# Altium PCB PlugCB.PcbDoc
Units mil, origin at the board's own origin, x right, y up, seen from the top; angles counter-clockwise.
Board outline 6000 x 4000 mil, 2 copper layers (Top Layer, Bottom Layer); 3 components, 0 nets, 21 pads, 0 vias.
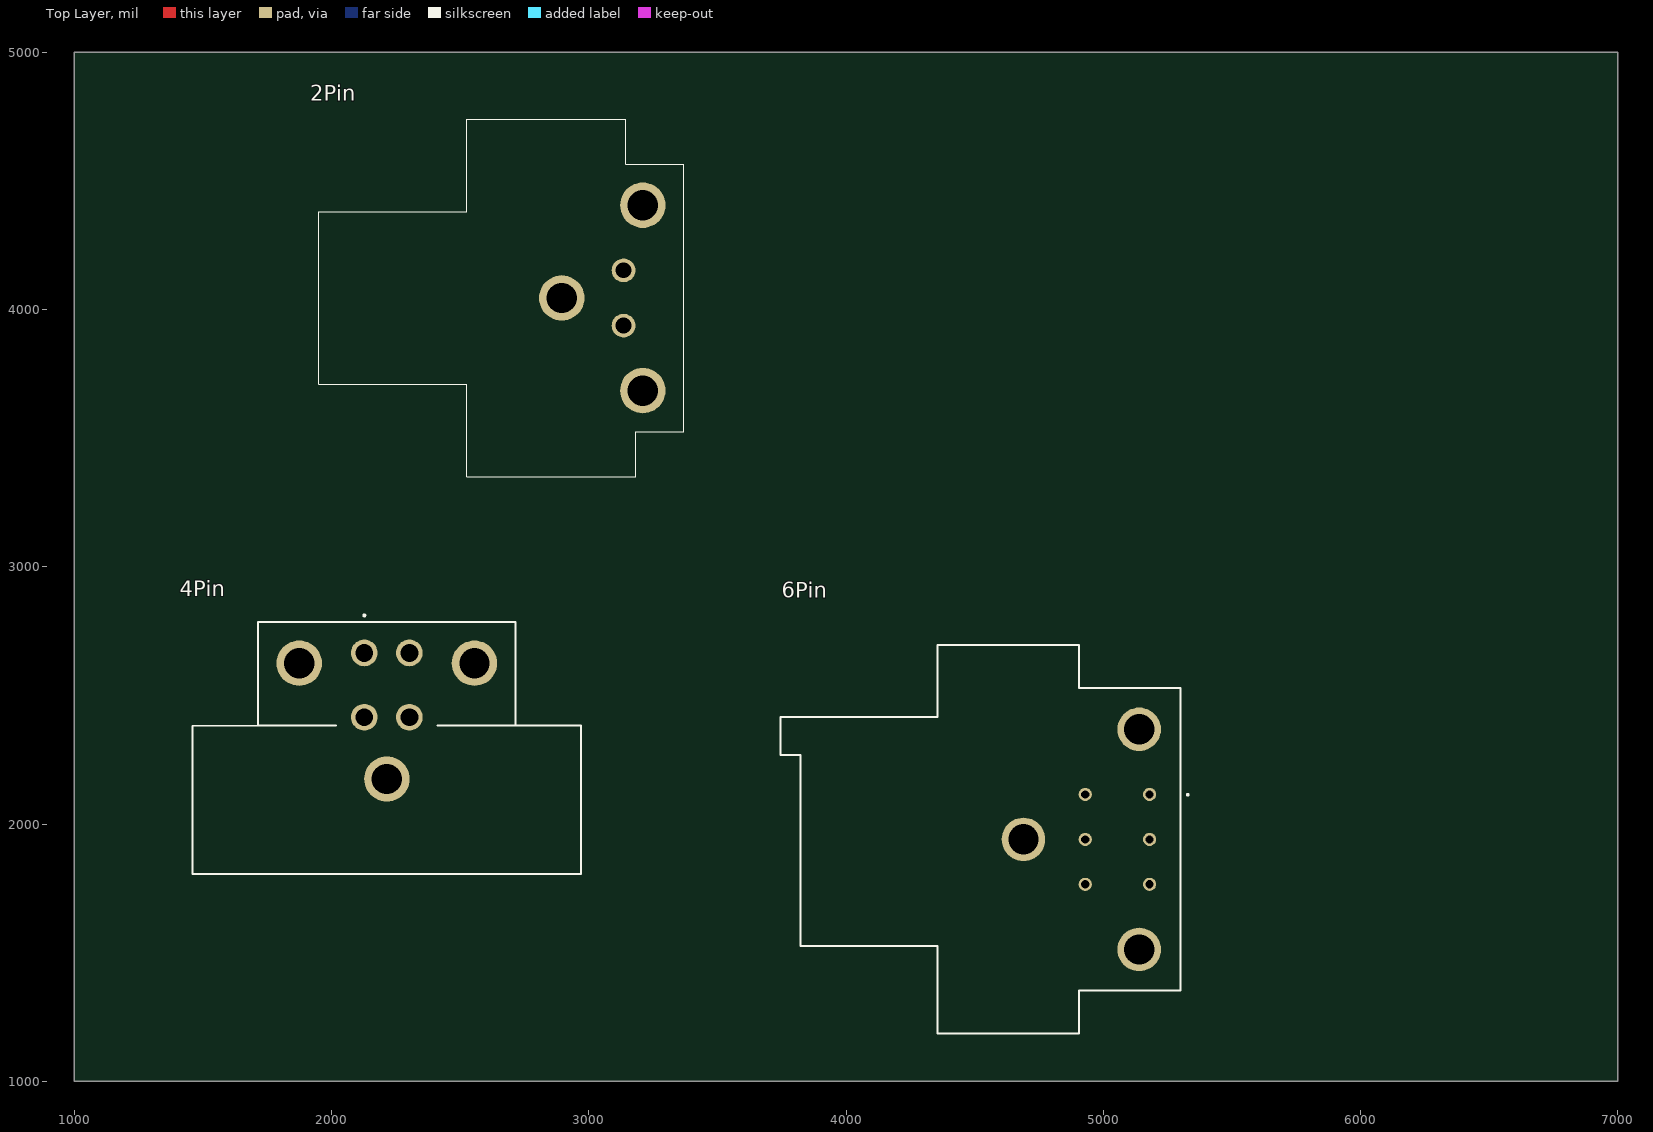
[diagram p0: Top Layer view]
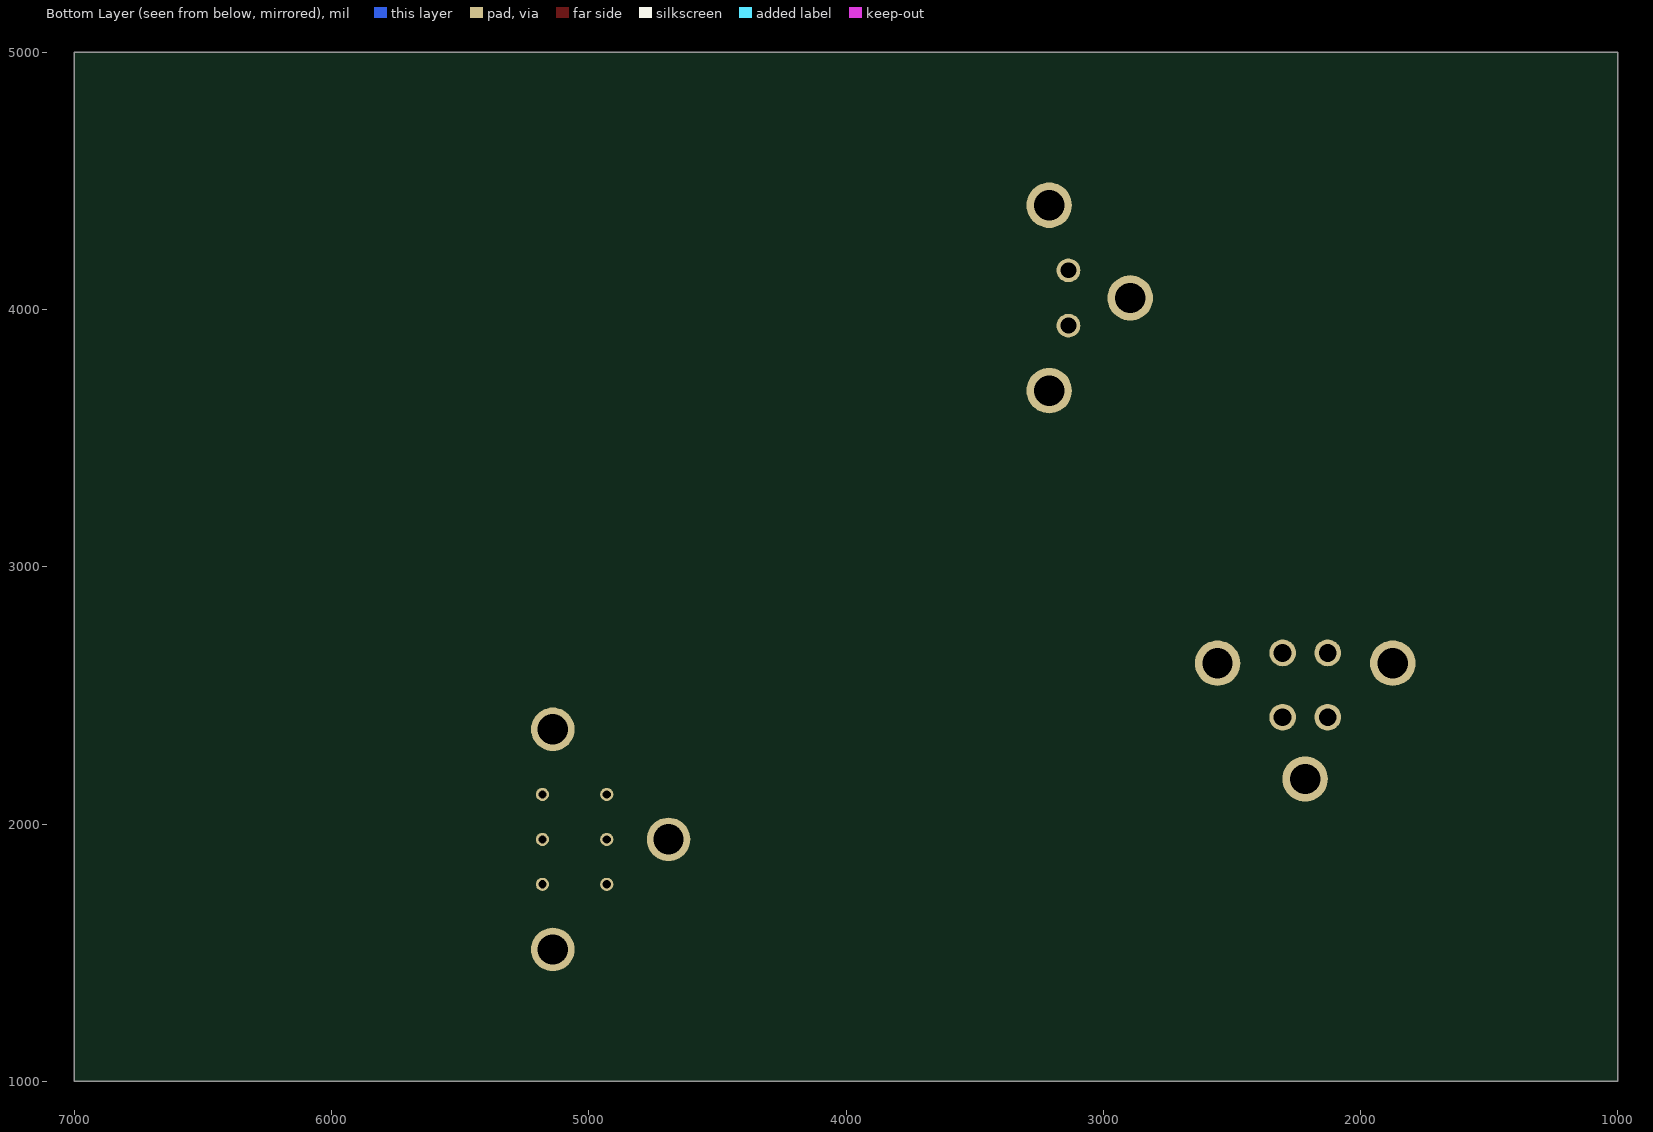
[diagram p1: Bottom Layer view, seen from below]

## Layer stack, top to bottom
Top Solder: solder mask 0.4, Solder Resist, Dk 3.5
Top Layer: signal copper 1.4
Dielectric 1: dielectric 12.6, FR-4, Dk 4.8
Bottom Layer: signal copper 1.4
Bottom Solder: solder mask 0.4, Solder Resist, Dk 3.5

## Board outline
1000,1000 7000,1000 7000,5000 1000,5000

## Design rules (kind name [scope] priority, off if disabled: settings)
Clearance [All] p1: gap=10 ignorepadtopadclearanceinfootprint=FALSE
PolygonConnect [All] p1: connectstyle=Relief reliefconductorwidth=10 reliefentries=4 polygonreliefangle="90 Angle" airgapwidth=10
RoutingVias [All] p1: holewidth=28 width=50 viastyle="Through Hole" minholewidth=28 minwidth=50 maxholewidth=28 maxwidth=50
SolderMaskExpansion [All] p1: expansion=4 istentingtop=FALSE
Width [All] p1: maxlimit=10 minlimit=10 preferedwidth=10
30 further rules are at their usual default settings.

## Components (designator, comment, footprint, x,y, rotation, side; value= is the part's Value field where it differs from the comment)
2Pin "DT13-2P" DT132P 3135.16,4152.48 r0 top
4Pin "DT13-4P" DT134P 2127.4,2665.16 r0 top
6Pin "DT13-6P" DT13-6P 5299.69,1940.2 r0 top

## Footprints (in the part's own frame and the unit in brackets; to place one, negate y for a bottom-side part, rotate by r counter-clockwise, add the part's x,y. Pads: shape width x height; smd on the part's side, far side on the other; paste and mask are expansions set on the pad)
DT13-6P [mm]
  round 1.3 hole 0.815: 1(-3.04,4.44) 2(-3.04,0) 3(-3.04,-4.44) 4(-9.39,-4.44) 5(-9.39,0) 6(-9.39,4.44)
  round 4.3 hole 2.99: 7(-4.06,10.87) 8(-15.49,0) 9(-4.06,-10.87)
  silkscreen extent -39.5,-19.18 0.81,19.18, body extent -39.44,-19.71 0.06,23.09, height 35.52
DT132P [mm]
  round 2.34 hole 1.56: 1(0,0) 2(0,-5.46)
  round 4.485 hole 2.99: 3(1.9,6.425) 4(1.9,-11.885) 5(-6.1,-2.73)
  silkscreen extent -30.11,-20.39 5.96,14.92, body extent -30.11,-20.38 5.96,14.92, height 27.78
DT134P [mm]
  round 2.64 hole 1.76: 1(0,0) 2(4.45,0) 3(4.45,-6.35) 4(0,-6.35)
  round 4.485 hole 2.99: MH1(-6.425,-1.02) MH2(10.875,-1.02) MH3(2.225,-12.45)
  silkscreen extent -16.95,-21.85 21.4,3.8, body extent -18.47,-36.48 19.89,3.02, height 35.55

## Part data
2Pin: "Connector", Manufacturer_Name="TE Connectivity", Mouser Part Number=571-DT13-2P, Arrow Part Number=DT13-2P, Arrow Price/Stock=https://www.arrow.com/en/products/dt13-2p/te-connectivity, Datasheet Link=https://www.te.com/commerce/DocumentDelivery/DDEController?Action=srchrtrv&DocNm=1-1773962-8&DocType=Data%20Sheet&DocLang=English&PartCntxt=DT13-2P&DocFormat=pdf, Height=27.43mm, Manufacturer_Part_Number=DT13-2P, Mouser Price/Stock=https://www.mouser.co.uk/ProductDetail/TE-Connectivity-DEUTSCH/DT13-2P?qs=vkMqrgFpRaiZ8Y45n18x4A%3D%3D
4Pin: "Connector", Manufacturer_Name="TE Connectivity", Mouser Part Number=571-DT13-4P, Datasheet Link=https://www.te.com/commerce/DocumentDelivery/DDEController?Action=srchrtrv&DocNm=1-1773962-8&DocType=Data%20Sheet&DocLang=English&PartCntxt=DT13-4P&DocFormat=pdf, Height=36.12mm, Manufacturer_Part_Number=DT13-4P, Mouser Price/Stock=https://www.mouser.co.uk/ProductDetail/TE-Connectivity-DEUTSCH/DT13-4P?qs=vkMqrgFpRajaLeBfOZKzWQ%3D%3D
6Pin: "Connector", Manufacturer_Name="TE Connectivity", Mouser Part Number=571-DT13-6P, Datasheet Link=https://www.te.com/commerce/DocumentDelivery/DDEController?Action=srchrtrv&DocNm=1-1773962-8&DocType=Data%20Sheet&DocLang=English&PartCntxt=DT13-6P&DocFormat=pdf, Manufacturer_Part_Number=DT13-6P, Mouser Price/Stock=https://www.mouser.co.uk/ProductDetail/TE-Connectivity-DEUTSCH/DT13-6P?qs=vkMqrgFpRajx%2FDSFtsLl9w%3D%3D

## Nets (pads, with @x,y where several pads share a name; then routed paths per layer and width w, separated by ;. In a path a pad name is that pad's centre, name@x,y a point inside that pad or via, vN(x,y) a via of type N, cw(c..) or ccw(c..) an arc to the next point about the centre after c; other vN are vias at no path point)
pads on no net: 2Pin.1 2Pin.2 2Pin.3 2Pin.4 2Pin.5 4Pin.1 4Pin.2 4Pin.3 4Pin.4 4Pin.MH1 4Pin.MH2 4Pin.MH3 6Pin.1 6Pin.2 6Pin.3 6Pin.4 6Pin.5 6Pin.6 6Pin.7 6Pin.8 6Pin.9